# Altium PCB FlexEMG_v0r0.PcbDoc (part 2 of 2)
Units mil, origin at the board's own origin, x right, y up, seen from the top; angles counter-clockwise.
Board outline 1300 x 1550 mil, 8 copper layers (Top Layer, PWR 1, Signal 1, GND, Signal 2, PWR 2, Signal 3, Bottom Layer), stack 66.302 mil thick; 200 components, 251 nets, 1187 pads, 472 vias.
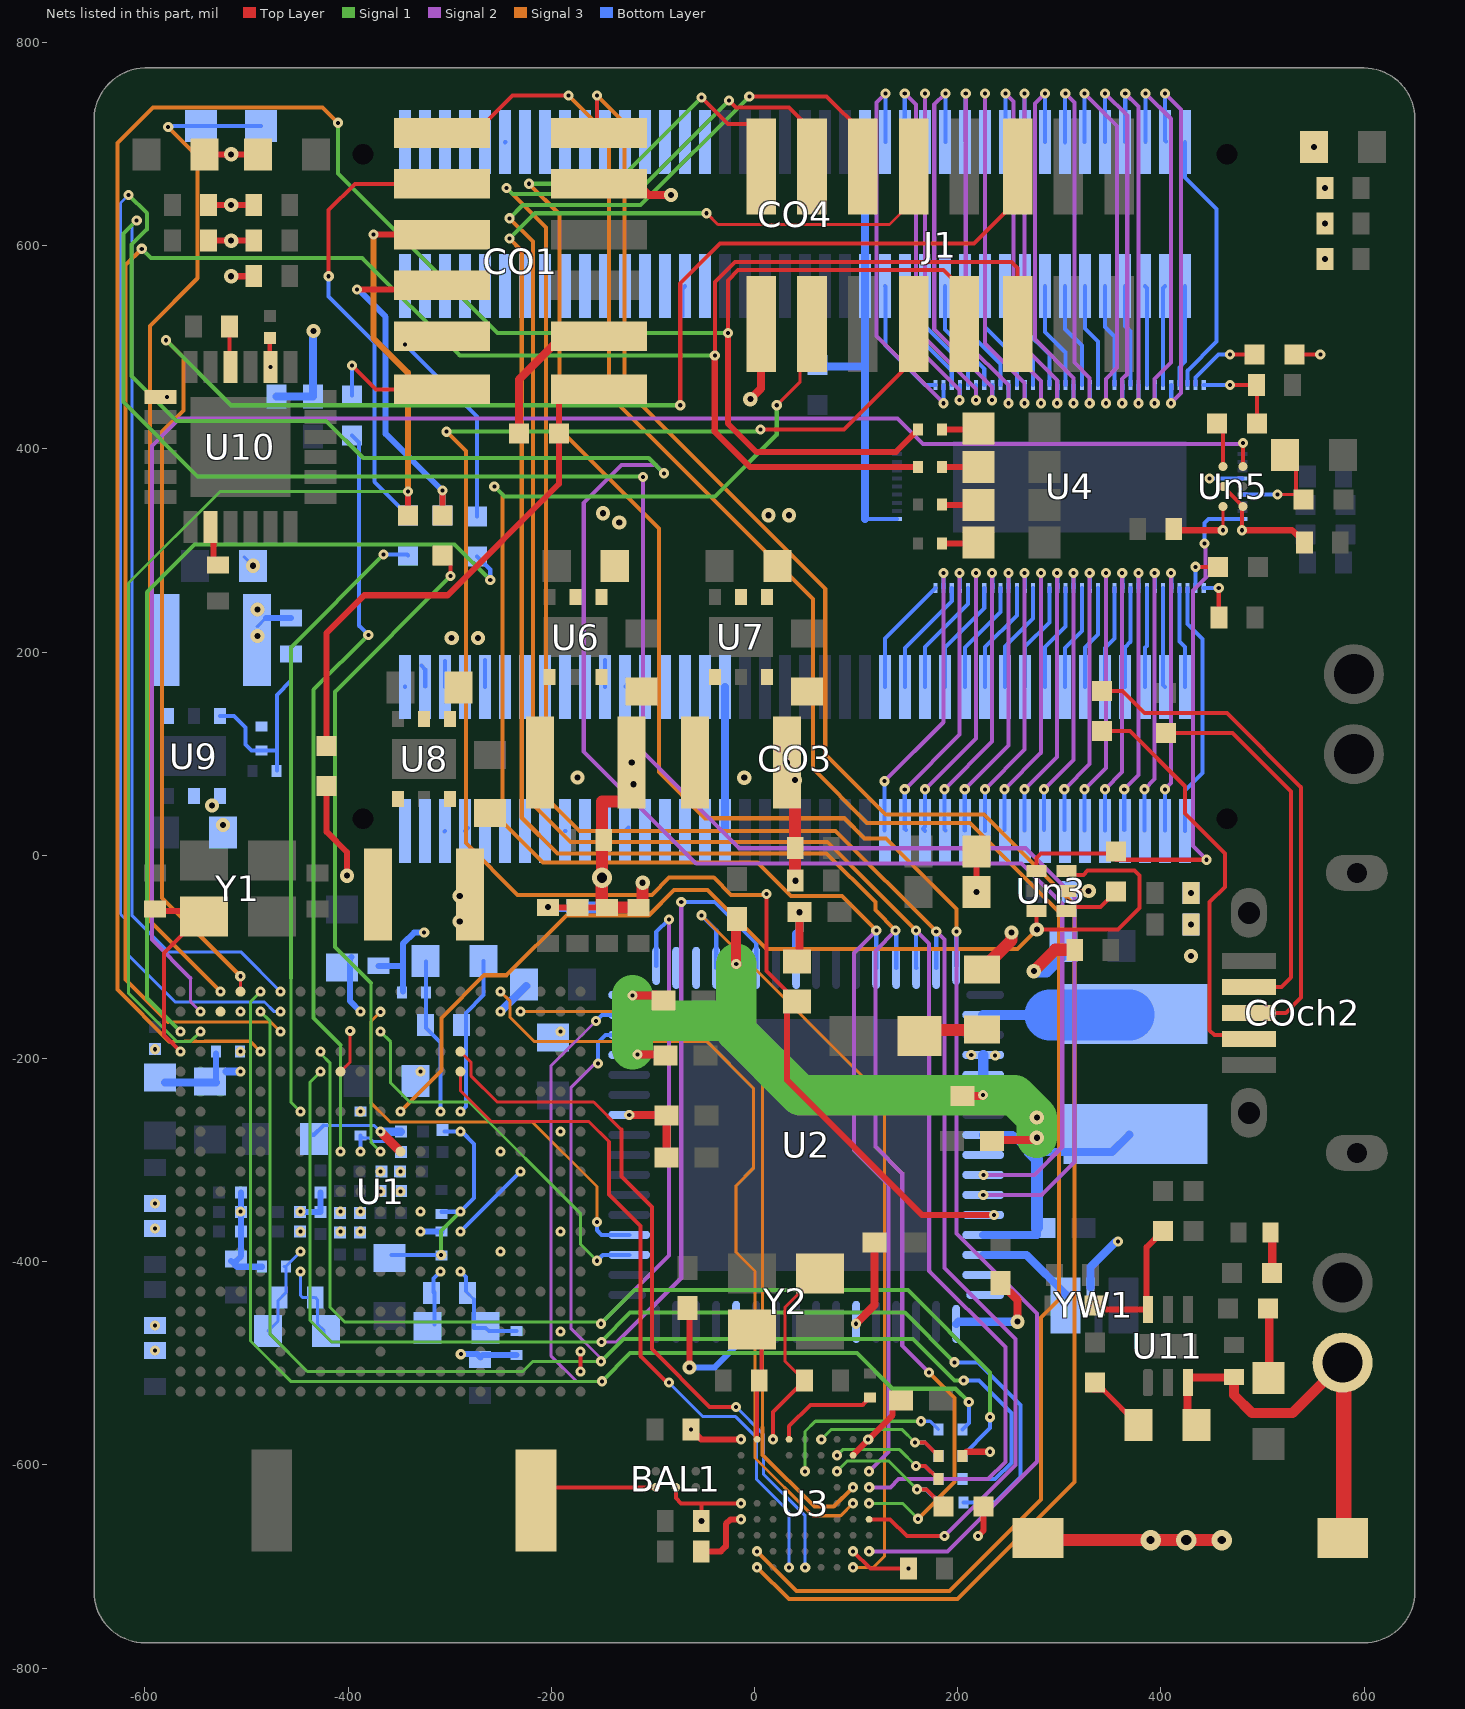
[diagram p8: the nets of this part, all layers, seen from the top]

## Via types
v1: diameter 10, hole 4, Top Layer to Bottom Layer, tented both sides, 361 vias
v2: diameter 14, hole 6, Top Layer to Bottom Layer, tented both sides, 104 vias
v3: diameter 16, hole 8, Top Layer to Bottom Layer, tented both sides, 3 vias
v4: diameter 20, hole 8, Top Layer to Bottom Layer, tented both sides, 2 vias
v5: diameter 20, hole 10, Top Layer to Bottom Layer, tented both sides, 2 vias

## Nets (pads, with @x,y where several pads share a name; then routed paths per layer and width w, separated by ;. In a path a pad name is that pad's centre, name@x,y a point inside that pad or via, vN(x,y) a via of type N, cw(c..) or ccw(c..) an arc to the next point about the centre after c; other vN are vias at no path point) (continued)
GPIO2: J1.11 RcC.2 U1.T3 | length 2232.5
  Top Layer w4: v1(-39,492) -39,564.31 -19.31,584 253.03,584 259.02,578.02 J1.11@259.02,523.15
  Top Layer w6: v1(-39,492) -39,417 -4.12,382.12 RcC.2@161.19,382.12
  Signal 1 w4: v1(-603,597) -594,588 -386,588 -290,492 v1(-39,492)
  Signal 3 w3: -576.98,-164.02 -475.93,-164.02 v1(-466.43,-173.52)
  Signal 3 w4: v1(-603,597) -619,581 -619,-122 -576.98,-164.02
GPIO3: J1.9 RcD.2 U1.U4 | length 2362.5
  Top Layer w4: v1(-26,514) -26,566 -16,576 186,576 206.65,555.35 J1.9@206.65,523.15
  Top Layer w6: v1(-26,514) -26,425 2,397 139.07,397 RcD.2@161.19,419.12
  Signal 1 w4: v1(-410,721) -410,671 -253,514 v1(-26,514)
  Signal 3 w3: -575.98,-183.02 -560.92,-183.02 -549.12,-183 -541.23,-183.02 ; -541.21,-183 -496.31,-183 v1(-486.11,-193.2)
  Signal 3 w4: -576,-183 -627,-132 -627,701 -592,736 -425,736 v1(-410,721)
GPIO4: J1.12 U1.V1 | length 1739.9
  Top Layer w3: U1.V1@-505.8,-134.15 v1@-505.8,-119.2
  Top Layer w4: v1(-73,443) -73,563 -34,602 216,602 259.02,645.02 J1.12@259.02,677.87
  Signal 1 w4: v1(-579,507) -515,443 v1(-73,443)
  Signal 3 w4: v1(-579,507) -562,490 -562,438 -583,417 -583,-42 v1(-506,-119)
GPIO5: R2.1 R2.2 U1.W1 | length 1003.4
  Signal 3 w4: v1(-577,717) -548,688 -548,568 -595,521 -595,-64.63 v1(-525.48,-134.15)
  Bottom Layer w4: v1(-577,717) -576,718 R2.1@-544.53,718 R2.2@-485.47,718
I2C.SCL: U2.63
I2C.SDA: U2.64
JTAG.T\R\S\T\: J1.2 U2.48 U3.H9 | length 2104.3
  Top Layer w4: v1(-52,746) -26,720 -3,720 6.65,710.35 J1.2@6.65,677.87 ; U3.H9@112.83,-685 v1(113,-685)
  Signal 2 w4: v1(113,-685) 189.86,-685 278,-596.86 278,-451.13 199,-372.13 v1(199,-75)
  Signal 1 w4: v1(-222,661) -137,661 v1(-52,746)
  Signal 3 w4: v1(-222,661) -192,631 -192,419.5 -94,321.5 -94,82 -48.5,36.5 88.5,36.5 108.5,16.5 129.5,16.5 199,-53 v1(199,-75)
  Bottom Layer w4: U2.48@198.64,-108.82 198.64,-75.36 v1(199,-75)
JTAG.TCK: J1.3 U2.44 U3.C9 | length 1776.8
  Top Layer w3: v1(22,443) 45,466 45,511.49 J1.3@56.65,523.15
  Signal 2 w4: v1(112.83,-606.26) 132,-587.09 132,-324 98,-290 98,-96 v1(120,-74)
  Signal 1 w4: v1(-256,363) -246,353 -39,353 22,414 v1(22,443)
  Signal 3 w3: v1(-256,363) -248,355
  Signal 3 w4: -248,355 -248,33 -208,-7 3,-7 36,-40 86,-40 v1(120,-74)
  Bottom Layer w3: v1@119.9,-74.1 v1(120,-74)
  Bottom Layer w4: U2.44@119.9,-110.79 v1@119.9,-74.1
JTAG.TDI: J1.4 U2.47 U3.F9 | length 2217
  Top Layer w3: J1.4@56.65,677.87 J1.4@56.65,710.35
  Top Layer w4: v1(-25,743) -18,736 34,736 56.65,713.35 J1.4@56.65,710.35 ; U3.F9@112.83,-653.5 133.5,-653.5 150,-670 v1(187,-670)
  Signal 2 w4: v1(179,-75) 187,-83 187,-406 257,-476 257,-600 v1(187,-670)
  Signal 1 w4: v1(-244,657) -238,651 -117,651 v1(-25,743)
  Signal 3 w4: v1(-244,657) -205,618 -205,57 -172,24 80,24 v1(179,-75)
  Bottom Layer w3: v1(179,-75) v1(179,-75)
  Bottom Layer w4: U2.47@178.95,-110.79 v1(179,-75)
JTAG.TDO: J1.6 U2.46 U3.D9 | length 2181.7
  Top Layer w3: U3.D9@112.83,-622.01 v1(112.99,-622.01)
  Top Layer w4: v1(-5,747) 71,747 106.65,711.35 J1.6@106.65,698
  Signal 2 w4: v1(112.99,-622.01) 133.99,-622.01 142,-614 230.14,-614 247,-597.14 247,-484 172,-409 172,-87 v1(159,-74)
  Signal 1 w4: v1(-241,627) -228,640 -112,640 v1(-5,747)
  Signal 3 w4: v1(-241,627) -218,604 -218,50 -181,13 72,13 127,-42 v1(159,-74)
  Bottom Layer w3: v1(159,-74) v1@159.27,-74.27
  Bottom Layer w4: v1(159,-74) 159,-110.52 U2.46@159.27,-110.79
JTAG.TMS: J1.8 U2.45 U3.E9 | length 2176.1
  Top Layer w3: v1(-47,632) -36,621 133,621 156.65,644.65 J1.8@156.65,677.87
  Signal 2 w4: v1(139,-74) 119,-94 119,-286.5 145.5,-313 145.5,-482.5 v1(172,-509)
  Signal 1 w3: v1(112.83,-637.76) 145.76,-637.76 v1(161,-653)
  Signal 1 w4: v1(-241,607) -216,632 v1(-47,632)
  Signal 3 w4: v1(-241,607) -229,595 -229,37 -194,2 71,2 119,-46 119,-54 v1(139,-74) ; v1(161,-653) 197,-617 197,-534 v1(172,-509)
  Bottom Layer w3: U2.45@139,-110.2 U2.45@139.58,-110.79
  Bottom Layer w4: v1(139,-74) 139.58,-74.58 U2.45@139.58,-110.79
JTAGSEL: Rc3.1 U1.V4
  other v1: -505.8,-193.2
N1_CLK: U1.Y2 Un5.C1 | length 1695.1
  Top Layer w4: Un5.C1@480.84,382.68 v1@480.84,405.16
  Signal 2 w3: -555,-121 -555,-144 v1(-545.17,-153.83)
  Signal 2 w4: -555,-121 -593,-83 -593,403 -566,430 141,430 166,405 480,405 v1(481,406)
N1_CLK_3V: Rn1.2 Un5.C2 | length 44.7
  Top Layer w4: Rn1.2@455.32,425 461.16,419.15 Un5.C2@461.16,382.68
N1_CLK_I: Cn1.2 Rn1.1 U4.86 | length 89.6
  Top Layer w4: v1(468,463) Cn1.2@494.28,463 ; Rn1.1@494.68,425 Cn1.2@494.68,462.6
  Bottom Layer w4: U4.86@442.25,463 v1(468,463)
N1_DC_1V: Cn9.2 U4.10 | length 38.9
  Top Layer w4: v1(457,263) 457,239.28 Cn9.2@457.28,239
  Bottom Layer w4: U4.10@442.25,263 v1(457,263)
N1_E00: CO4.2 U4.84 | length 263.7
  Bottom Layer w4: CO4.2@423.86,701.87 423.86,667.14 455,636 455,505.69 426.25,476.94 U4.84@426.25,463
N1_E01: CO4.1 U4.83 | length 99.5
  Bottom Layer w4: U4.83@418.25,463 418.25,480.25 423.86,485.86 CO4.1@423.86,560.13
N1_E02: CO4.4 U4.82 | length 381.5
  Signal 2 w4: v1(404,750) 420,734 420,455 v1(410,445)
  Bottom Layer w4: v1(404,750) 404,703.69 CO4.4@405,702.69 ; v1@410.25,445 U4.82@410.25,463
N1_E03: CO4.3 U4.81 | length 97.9
  Bottom Layer w4: U4.81@402.25,463 402.25,558.21 CO4.3@404.17,560.13
N1_E04: CO4.6 U4.80 | length 387.6
  Signal 2 w4: v1(385,750) 410,725 410,485 394,469 v1(394,445)
  Bottom Layer w4: CO4.6@385,702.38 v1(385,750) ; v1@394.25,445 U4.80@394.25,463
N1_E05: CO4.5 U4.79 | length 97.9
  Bottom Layer w4: CO4.5@384.49,560.13 386.25,558.37 U4.79@386.25,463
N1_E06: CO4.8 U4.78 | length 376.3
  Signal 2 w4: v1(365,750) 378,737 v1(378,445)
  Bottom Layer w4: CO4.8@365,702.06 v1(365,750) ; v1@378.25,445 U4.78@378.25,463
N1_E07: CO4.7 U4.77 | length 99.4
  Bottom Layer w4: CO4.7@364.8,560.13 365,559.94 365,521 370.25,515.75 U4.77@370.25,463
N1_E08: CO4.10 U4.76 | length 382.2
  Signal 2 w4: v1(345,750) 367,728 367,474 362,469 v1(362,445)
  Bottom Layer w4: CO4.10@345,701.98 v1(345,750) ; v1@362.25,445 U4.76@362.25,463
N1_E09: CO4.9 U4.75 | length 100.9
  Bottom Layer w4: CO4.9@345.12,560.13 345.12,519.88 354.25,510.75 U4.75@354.25,463
N1_E10: CO4.12 U4.74 | length 388.5
  Signal 2 w4: v1(325,750) 357,718 357,480 346,469 v1(346,445)
  Bottom Layer w4: CO4.12@325,702.3 v1(325,750) ; v1@346.25,445 U4.74@346.25,463
N1_E11: CO4.11 U4.73 | length 102.4
  Bottom Layer w4: CO4.11@325.43,560.13 325.43,518.57 338.25,505.75 U4.73@338.25,463
N1_E12: CO4.14 U4.72 | length 381.1
  Signal 2 w4: v1(306,750) 315,741 315,485 330,470 v1(330,445)
  Bottom Layer w4: CO4.14@305.75,701.87 v1@305.75,750 ; v1@330.25,445 U4.72@330.25,463
N1_E13: CO4.13 U4.71 | length 104
  Bottom Layer w4: CO4.13@305.75,560.13 305.75,518.25 322.25,501.75 U4.71@322.25,463
N1_E14: CO4.16 U4.70 | length 391
  Signal 2 w4: v1(286,750) 276,740 276,508 314,470 v1(314,445)
  Bottom Layer w4: CO4.16@286,701.93 v1(286,750) ; v1@314.25,445 U4.70@314.25,463
N1_E15: CO4.15 U4.69 | length 105.5
  Bottom Layer w4: CO4.15@286.06,560.13 286.06,514.94 306.25,494.75 U4.69@306.25,463
N1_E16: CO4.18 U4.68 | length 384
  Signal 2 w4: v1(266,750) 266,500 298,468 v1(298,445)
  Bottom Layer w4: CO4.18@266,702.24 v1(266,750) ; v1@298.25,445 U4.68@298.25,463
N1_E17: CO4.17 U4.67 | length 107
  Bottom Layer w4: CO4.17@266.38,560.13 266.38,516.62 290.25,492.75 U4.67@290.25,463
N1_E18: CO4.20 U4.66 | length 385.3
  Signal 2 w4: v1(247,750) 255,742 255,494 282,467 v1(282,445)
  Bottom Layer w4: CO4.20@247,702.17 v1(247,750) ; v1@282.25,445 U4.66@282.25,463
N1_E19: CO4.19 U4.65 | length 108.5
  Bottom Layer w4: CO4.19@246.69,560.13 246.69,518.31 274.25,490.75 U4.65@274.25,463
N1_E20: CO4.22 U4.64 | length 387.3
  Signal 2 w4: v1(227,750) 227,504 266,465 v1(266,445)
  Bottom Layer w4: CO4.22@227.01,701.87 v1(227,750) ; v1@266.25,445 U4.64@266.25,463
N1_E21: CO4.21 U4.63 | length 110.1
  Bottom Layer w4: CO4.21@227.01,560.13 227.01,519.99 258.25,488.75 U4.63@258.25,463
N1_E22: CO4.24 U4.62 | length 387.9
  Signal 2 w4: v1(208,750) 208,505 250,463 v1(250,445)
  Bottom Layer w4: CO4.24@208,702.54 v1(208,750) ; v1@250.25,445 U4.62@250.25,463
N1_E23: CO4.23 U4.61 | length 111.6
  Bottom Layer w4: CO4.23@207.32,560.13 207.32,518.68 242.25,483.75 U4.61@242.25,463
N1_E24: CO4.26 U4.60 | length 392.9
  Signal 2 w4: v1(188,750) 177,739 177,518 234,461 v1(234,448)
  Bottom Layer w4: CO4.26@188,702.23 v1(188,750) ; v1@234.25,448 U4.60@234.25,463
N1_E25: CO4.25 U4.59 | length 113.1
  Bottom Layer w4: CO4.25@187.64,560.13 187.64,517.36 226.25,478.75 U4.59@226.25,463
N1_E26: CO4.28 U4.58 | length 385.8
  Signal 2 w4: v1(168,750) 168,509 218,459 v1(218,448)
  Bottom Layer w4: CO4.28@167.95,701.87 v1(168,750) ; v1@218.25,448 U4.58@218.25,463
N1_E27: CO4.27 U4.57 | length 114.7
  Bottom Layer w4: CO4.27@167.95,560.13 167.95,521.05 210.25,478.75 U4.57@210.25,463
N1_E28: CO4.30 U4.56 | length 386.9
  Signal 2 w4: v1(148,750) 159,739 159,501 202,458 v1(202,448)
  Bottom Layer w4: v1(148,750) 148,703.6 CO4.30@149,702.6 ; v1@202.25,448.25 U4.56@202.25,463
N1_E29: CO4.29 U4.55 | length 116.2
  Bottom Layer w4: CO4.29@148.27,560.13 149,559.4 149,522 194.25,476.75 U4.55@194.25,463
N1_E30: CO4.32 U4.54 | length 401.8
  Signal 2 w4: v1(129,750) 120,741 120,511 v1(186,445)
  Bottom Layer w4: CO4.32@129,702.28 v1(129,750) ; v1@186.25,445 U4.54@186.25,463
N1_E31: CO4.31 U4.53 | length 123.7
  Bottom Layer w4: CO4.31@128.58,560.13 129,559.72 129,502 168,463 U4.53@178.25,463
N1_E32: CO3.80 U4.12 | length 252.1
  Bottom Layer w4: CO3.80@423.86,24.13 423.86,63.86 441,81 441,213 426.25,227.75 U4.12@426.25,263
N1_E33: CO3.79 U4.13 | length 99.5
  Bottom Layer w4: U4.13@418.25,263 418.25,210.46 423.86,204.86 CO3.79@423.86,165.87
N1_E34: CO3.78 U4.14 | length 270.9
  Signal 2 w4: v1(404,65) 410,71 v1(410,278)
  Bottom Layer w4: CO3.78@404,24.31 v1(404,65) ; U4.14@410.25,263 v1@410.25,277.75
N1_E35: CO3.77 U4.15 | length 97.9
  Bottom Layer w4: U4.15@402.25,263 402.25,167.79 CO3.77@404.17,165.87
N1_E36: CO3.76 U4.16 | length 272.3
  Signal 2 w4: v1(384,65) 394,75 v1(394,278)
  Bottom Layer w4: CO3.76@384,24.62 v1(384,65) ; U4.16@394.25,263 v1@394.25,277.75
N1_E37: CO3.75 U4.17 | length 97.9
  Bottom Layer w4: CO3.75@384.49,165.87 384.49,204.49 386.25,206.25 U4.17@386.25,263
N1_E38: CO3.74 U4.18 | length 273.6
  Signal 2 w4: v1(364,65) 378,79 v1(378,278)
  Bottom Layer w4: CO3.74@364,24.94 v1(364,65) ; U4.18@378.25,263 v1@378.25,277.75
N1_E39: CO3.73 U4.19 | length 99.4
  Bottom Layer w4: CO3.73@364.8,165.87 364.8,204.8 370.25,210.25 U4.19@370.25,263
N1_E40: CO3.72 U4.20 | length 275.5
  Signal 2 w4: v1(345,65) 362,82 v1(362,278)
  Bottom Layer w4: CO3.72@345,24.25 v1(345,65) ; U4.20@362.25,263 v1@362.25,277.75
N1_E41: CO3.71 U4.21 | length 100.9
  Bottom Layer w4: CO3.71@345.12,165.87 345.12,204.12 354.25,213.25 U4.21@354.25,263
N1_E42: CO3.70 U4.22 | length 276.9
  Signal 2 w4: v1(325,65) 346,86 v1(346,278)
  Bottom Layer w4: CO3.70@325,24.57 v1(325,65) ; U4.22@346.25,263 v1@346.25,277.75
N1_E43: CO3.69 U4.23 | length 102.4
  Bottom Layer w4: CO3.69@325.43,165.87 325.43,204.57 338.25,217.39 U4.23@338.25,263
N1_E44: CO3.68 U4.24 | length 278.2
  Signal 2 w4: v1(305,65) 330,90 v1(330,278)
  Bottom Layer w4: CO3.68@305,24.88 v1(305,65) ; U4.24@330.25,263 v1@330.25,277.75
N1_E45: CO3.67 U4.25 | length 104
  Bottom Layer w4: CO3.67@305.75,165.87 305.75,204.25 322.25,220.76 U4.25@322.25,263
N1_E46: CO3.66 U4.26 | length 279.6
  Signal 2 w4: v1(285,65) 314,94 v1(314,278)
  Bottom Layer w4: CO3.66@285,25.2 v1(285,65) ; U4.26@314.25,263 v1@314.25,277.75
N1_E47: CO3.65 U4.27 | length 105.5
  Bottom Layer w4: CO3.65@286.06,165.87 286.06,204.94 306.25,225.13 U4.27@306.25,263
N1_E48: CO3.64 U4.28 | length 281.5
  Signal 2 w4: v1(266,65) 298,97 v1(298,278)
  Bottom Layer w4: CO3.64@266,24.51 v1(266,65) ; U4.28@298.25,263 v1@298.25,277.75
N1_E49: CO3.63 U4.29 | length 107
  Bottom Layer w4: CO3.63@266.38,165.87 266.38,205.38 290.25,229.25 U4.29@290.25,263
N1_E50: CO3.62 U4.30 | length 282.8
  Signal 2 w4: v1(246,65) 282,101 v1(282,278)
  Bottom Layer w4: CO3.62@246,24.83 v1(246,65) ; U4.30@282.25,263 v1@282.25,277.75
N1_E51: CO3.61 U4.31 | length 108.5
  Bottom Layer w4: CO3.61@246.69,165.87 246.69,205.69 274.25,233.25 U4.31@274.25,263
N1_E52: CO3.60 U4.32 | length 284.8
  Signal 2 w4: v1(227,65) 266,104 v1(266,278)
  Bottom Layer w4: CO3.60@227.01,24.13 v1(227,65) ; U4.32@266.25,263 v1@266.25,277.75
N1_E53: CO3.59 U4.33 | length 110.1
  Bottom Layer w4: CO3.59@227.01,165.87 227.01,204.99 258.25,236.24 U4.33@258.25,263
N1_E54: CO3.58 U4.34 | length 286.1
  Signal 2 w4: v1(207,65) 250,108 v1(250,278)
  Bottom Layer w4: CO3.58@207,24.46 v1(207,65) ; U4.34@250.25,263 v1@250.25,277.75
N1_E55: CO3.57 U4.35 | length 111.6
  Bottom Layer w4: CO3.57@207.32,165.87 207.32,204.68 242.25,239.61 U4.35@242.25,263
N1_E56: CO3.56 U4.36 | length 288.1
  Signal 2 w4: v1(187,65) 234,112 v1(234,278)
  Bottom Layer w4: v1(187,65) 187,25.5 CO3.56@188,24.5 ; U4.36@234.25,263 v1@234.25,277.75
N1_E57: CO3.55 U4.37 | length 113.1
  Bottom Layer w4: CO3.55@187.64,165.87 187.64,204.64 226.25,243.25 U4.37@226.25,263
N1_E58: CO3.54 U4.38 | length 290.9
  Signal 2 w4: v1(168,65) 218,115 v1(218,278)
  Bottom Layer w4: CO3.54@168,24.18 166,26.18 168,28.18 v1(168,65) ; U4.38@218.25,263 v1@218.25,277.75
N1_E59: CO3.53 U4.39 | length 114.7
  Bottom Layer w4: CO3.53@167.95,165.87 167.95,204.95 210.25,247.25 U4.39@210.25,263
N1_E60: CO3.52 U4.40 | length 290.7
  Signal 2 w4: v1(148,65) 202,119 v1(202,278)
  Bottom Layer w4: v1(148,65) 148,25.87 CO3.52@149,24.87 ; U4.40@202.25,263 v1@202.25,277.75
N1_E61: CO3.51 U4.41 | length 116.2
  Bottom Layer w4: CO3.51@148.27,165.87 148.27,204.27 194.25,250.25 U4.41@194.25,263
N1_E62: CO3.50 U4.42 | length 292.1
  Signal 2 w4: v1(128,73) 186,131 v1(186,278)
  Bottom Layer w4: CO3.50@128,24.72 v1(128,73) ; U4.42@186.25,263 v1@186.25,277.75
N1_E63: CO3.49 U4.43 | length 117.7
  Bottom Layer w4: CO3.49@128.58,165.87 128.58,213.33 U4.43@178.25,263
N2_CLK: U1.W2
N2_E00: CO4.49
N2_E01: CO4.50
N2_E02: CO4.51 | length 30.3
  Bottom Layer w4: CO4.51@-71,531 -71,557.4 CO4.51@-68.27,560.13
N2_E03: CO4.52
N2_E04: CO4.53
N2_E05: CO4.54
N2_E06: CO4.55
N2_E07: CO4.56
N2_E08: CO4.57
N2_E09: CO4.58
N2_E10: CO4.59
N2_E11: CO4.60
N2_E12: CO4.61
N2_E13: CO4.62
N2_E14: CO4.63
N2_E15: CO4.64
N2_E16: CO4.65
N2_E17: CO4.66
N2_E18: CO4.67
N2_E19: CO4.68
N2_E20: CO4.69
N2_E21: CO4.70 | length 0.6
  Bottom Layer w4: CO4.70@-245.43,701.87 CO4.70@-245,702.3
N2_E22: CO4.71
N2_E23: CO4.72
N2_E24: CO4.73
N2_E25: CO4.74
N2_E26: CO4.75
N2_E27: CO4.76
N2_E28: CO4.77
N2_E29: CO4.78
N2_E30: CO4.79
N2_E31: CO4.80
N2_E32: CO3.31
N2_E33: CO3.32
N2_E34: CO3.29
N2_E35: CO3.30
N2_E36: CO3.27
N2_E37: CO3.28
N2_E38: CO3.25
N2_E39: CO3.26
N2_E40: CO3.23 | length 4.2
  Bottom Layer w4: CO3.23@-127,166.19 CO3.23@-124,169.19
N2_E41: CO3.24 | length 4.7
  Bottom Layer w4: CO3.24@-127.32,24.13 CO3.24@-124,27.46
N2_E42: CO3.21 | length 26.2
  Bottom Layer w4: CO3.21@-147.01,165.87 CO3.21@-147.01,192.07
N2_E43: CO3.22
N2_E44: CO3.19
N2_E45: CO3.20
N2_E46: CO3.17
N2_E47: CO3.18 | length 0.5
  Bottom Layer w4: CO3.18@-186.38,24.13 CO3.18@-186,23.76
N2_E48: CO3.15
N2_E49: CO3.16
N2_E50: CO3.13
N2_E51: CO3.14
N2_E52: CO3.11
N2_E53: CO3.12
N2_E54: CO3.9 | length 26.2
  Bottom Layer w4: CO3.9@-265.12,165.87 CO3.9@-265.12,192.07
N2_E55: CO3.10
N2_E56: CO3.7
N2_E57: CO3.8 | length 4
  Bottom Layer w4: CO3.8@-284.8,24.13 CO3.8@-282,26.94
N2_E58: CO3.5 | length 25.6
  Bottom Layer w4: CO3.5@-304.49,165.87 CO3.5@-304.49,191.49
N2_E59: CO3.6 | length 0.7
  Bottom Layer w4: CO3.6@-305,23.62 CO3.6@-304.49,24.13
N2_E60: CO3.3 | length 22.3
  Bottom Layer w4: CO3.3@-327.75,186.75 -324,183 CO3.3@-324,166.04
N2_E61: CO3.4
N2_E62: CO3.1 | length 0.2
  Bottom Layer w4: CO3.1@-343.86,165.87 CO3.1@-343.75,165.98
N2_E63: CO3.2
N12C_D: U1.K7 Un3.3 Un3.6 | length 1015.9
  Top Layer w4: v2@277.47,-72.47 Un3.3@277.47,-54.68 ; v2(278,-73) 358,-73 379,-52 379,-20 374,-15 328,-15 323.84,-19.16 310.85,-19.16 Un3.6@307,-15.32
  Signal 3 w4: v1(-348.32,-252.26) -308,-211.94 -308,-160 -266,-118 -244,-118 -185,-59 -104,-59 -79,-34 -46,-34 12,-92 259,-92 v2(278,-73)
N12C_D_I: Rn9.1 U4.9 Un3.1 | length 566.9
  Top Layer w4: Un3.1@277.47,-15.32 277.47,-2.53 282,2 349.69,2 356,-4.32 v1(445,-4.32)
  Signal 2 w4: v1(443,307) 444,306 444,275 445,274 431.68,260.68 431.68,9 v1(445,-4.32)
  Bottom Layer w4: v1(443,307) 443,327 447,331 U4.9@480.25,331
NetANT1_1: ANT1.1 BAL1.A1 | length 117.9
  Top Layer w4: ANT1.1@-210,-633.9 -198.1,-622 BAL1.A1@-97,-622
NetCa3_2: Ca3.2 U10.20 | length 38
  Top Layer w6: Ca3.2@-532.53,285.29 U10.20@-532.53,323.26
NetCa4_2: Ca4.2 U10.10 | length 39
  Top Layer w4: U10.10@-516.68,481.57 Ca4.2@-516.68,520.53
NetCd1_2: Cd1.2 Cd2.2 Rd2.2 Rd3.1 U1.G8 U1.G12 | length 224.7
  Signal 1 w4: v1(-308.27,-393.43) -308.27,-369.69 v1(-289.26,-350.68)
  Bottom Layer w4: Cd1.2@-357,-393.43 v1(-308.27,-393.43) ; Rd3.1@-308.12,-350.81 -289.39,-350.81 v1(-289.26,-350.68) -276,-337.43 -276,-284 -288.06,-271.94 v1(-289.26,-271.94) Cd2.2@-305.23,-271.94
NetCe1_1: Ce1.1 Re1.2 | length 40.8
  Top Layer w8: Ce1.1@507.75,-371 509.68,-372.94 Re1.2@509.68,-411
NetCe3_1: Ce3.1 Re5.2 | length 58.6
  Top Layer w5: Re5.2@334,-526 343.32,-526 Ce3.1@378.14,-560.82
NetCn2_2: Cn2.2 Rn3.1 U4.6 | length 104.2
  Top Layer w3: v1(515,355) 535.32,355 Rn3.1@540.32,350
  Top Layer w4: Cn2.2@525.46,393 533,385.46 533,357.32 Rn3.1@535.32,355
  Bottom Layer w4: U4.6@480.25,355 v1(515,355)
NetCOch2_2: COch2.2 Re8.2 | length 409.1
  Top Layer w4: Re8.2@342,122.32 369.68,122.32 424,68 424,41 463,2 463,-31 448,-46 448,-172.18 452.82,-177 483.02,-177 COch2.2@486.61,-180.59
NetCOch2_3: COch2.3 Re8.1 | length 499.8
  Top Layer w4: Re8.1@342,161.68 362.32,161.68 384,140 465,140 538,67 538,-140 523,-155 COch2.3@486.61,-155
NetCOch2_4: COch2.4 Re7.2 | length 375
  Top Layer w4: Re7.2@405,120.32 470.68,120.32 528,63 528,-120 518.59,-129.41 COch2.4@486.61,-129.41
NetCr5_2: Cr5.2 U3.A4 | length 104.5
  Top Layer w4: U3.A4@34.09,-574.76 34.09,-561.91 55,-541 106.62,-541 Cr5.2@114,-533.62
NetCs9_1: Cs9.1 Rs1.1 Rs2.2 U9.3 | length 199.9
  Bottom Layer w3: Rs1.1@-485.12,103.19 Rs1.1@-484.93,103 ; Rs2.2@-470.19,83.12 Rs2.2@-470,83.31 ; -470.19,102 -470,102.19
  Bottom Layer w4: U9.3@-526,137 -512,137 -501,126 -501,109 -495.02,103.02 Rs1.1@-486.59,103.02 ; Rs1.1@-484.93,103 -470,103 ; Rs2.2@-470,83.31 -470,158 -456,172 Cs9.1@-456,198.28
NetJ1_7: J1.7 R1.1 U2.60 | length 1744
  Top Layer w4: v1(6,419) 88,419 156.65,487.65 J1.7@156.65,523.15 ; v1(12,-38) 12,-113.68 R1.1@42,-143.68
  Top Layer w6: R1.1@42,-143.68 32,-143.68 32,-221 164.9,-353.9 v1(235.9,-353.9)
  Signal 1 w4: v1(-303,417) 4,417 v1(6,419)
  Signal 3 w4: v1(-303,417) -284,398 -284,12 -233,-39 -101,-39 -84,-22 -40,-22 -23,-39 11,-39 v1(12,-38)
  Bottom Layer w3: U2.60@225.21,-353.9 v1(235.9,-353.9)
NetL1_2: L1.2 U2.50 | length 143.8
  Bottom Layer w10: U2.50@225.21,-157.05 291,-157.05
  Bottom Layer w50: 291,-157.05 368.9,-157.05 L1.2@369,-156.94
NetLED0_1: LED0.1 Rc0.1 | length 35.8
  Top Layer w6: Rc0.1@184.81,345.12 184.93,345 LED0.1@220.52,345
NetLED1_1: LED1.1 Rc1.1 | length 36.9
  Top Layer w6: Rc1.1@184,307.12 Rc1.1@184.81,307.12 219.64,307.12 LED1.1@220.52,308
NetLED2_1: LED2.1 RcC.1 | length 35.6
  Top Layer w6: RcC.1@184.81,382.12 LED2.1@220.4,382.12
NetLED3_1: LED3.1 RcD.1 | length 34.8
  Top Layer w6: RcD.1@184.81,419.12 LED3.1@219.64,419.12
NetLED4_1: LED4.1 Re2.1 | length 67.8
  Top Layer w8: LED4.1@506.68,-513.83 Re2.1@506.68,-446
NetLs1_2: Ls1.2 U6.1
NetLs2_2: Ls2.2 U7.1
NetLs3_2: Ls3.2 U8.1
NetLs4_2: Ls4.2 U9.1
NetRe4_2: Re4.2 Re6.1 U11.6 | length 140.2
  Top Layer w6: Re6.1@333.17,-447.07 U11.6@387.32,-447.07 ; U11.6@386,-447.07 386,-385.59 Re4.2@402,-369.58 ; Re4.2@404,-371.55 Re4.2@404,-369.59
NetRn2_1: Rn2.1 U4.85 | length 74.9
  Top Layer w4: v1(468,493) Rn2.1@492.32,493
  Bottom Layer w4: U4.85@434.25,463 434.25,470.49 456.77,493 v1(468,493)
NetRn4_2: Rn4.2 U4.11 | length 43.1
  Top Layer w4: v1(434,284) Rn4.2@456.32,284
  Bottom Layer w4: U4.11@434.25,263 v1@434.25,283.75
NetRn9_2: Rn9.2 Un3.4 | length 56.9
  Top Layer w4: Un3.4@307,-54.68 310.68,-51 340.69,-51 Rn9.2@356,-35.68
NetU1_A19: U1.A19 U1.A20 | length 19.7
  Top Layer w4: v1(-171.15,-508.17) v1(-171.15,-488.48)
NetU1_D10: U1.D10 U1.G13 | length 83.5
  Bottom Layer w4: v1(-289.26,-370.37) v1(-230.2,-311.32)
NetU1_G4: U1.G4 U3.J5 | length 719.2
  Top Layer w3: U1.G4@-289.26,-193.2 -279.07,-203.39 -279.07,-216.9 -253.21,-242.76 -158.24,-242.76 -131,-270
  Top Layer w4: -131,-270 -131,-316 -101,-346 -101,-486 -44,-543 v1(-18,-543)
  Bottom Layer w3: v1(-18,-543) 8.85,-569.85 8.85,-608.85 50,-650 v1(50,-701)
NetU1_G5: U1.G5 U3.J4 | length 698.2
  Top Layer w3: U1.G5@-289.26,-212.89 -289.26,-231.74 -259,-262 -163,-262 -143,-282 ; v1@-86,-519 v1(-84,-519)
  Top Layer w4: -143,-282 -143,-334 -112,-365 -112,-493 v1@-86,-519
  Bottom Layer w3: v1(-84,-519) -50.5,-552.5 -18.5,-552.5 1.85,-572.85 1.85,-613.85 34,-646 v1(34,-701)
NetU1_L2: U1.L2 U2.20 | length 427
  Top Layer w3: v1(-368,-154) U1.L2@-368,-153.83
  Signal 3 w3: v1(-368,-154) -377.5,-163.5 -377.5,-243.5 -358.56,-262.44 -218.56,-262.44 -155,-326 v1(-155,-361)
  Bottom Layer w4: v1(-155,-361) -155,-369 -150.42,-373.58 U2.20@-123.21,-373.58
NetU1_L3: U1.L3 U2.19 | length 382
  Signal 1 w3: v1(-368,-173.52) -358,-183.52 -358,-224 -339.24,-242.76 -281,-242.76 -171,-352.76 -171,-383 v1(-155,-399)
  Bottom Layer w4: v1(-155,-399) -149.27,-393.27 U2.19@-123.21,-393.27
NetU1_T1: U1.T1 U2.59 | length 2708.3
  Signal 2 w4: v1(-109.5,372.5) -109.5,101.5 -15,7 267,7 315,-41 315,-302 282.79,-334.21 v1(225.21,-334.21)
  Signal 1 w4: v1(-608,625) -621,612 -621,446 -548,373 -110,373 v1(-109.5,372.5)
  Bottom Layer w3: v1(-608,625) -612.5,620.5 -612.5,-59.5 -577,-95 -505.57,-95 v1(-466.43,-134.15)
NetU1_T2: U1.T2 U2.58 | length 2887.1
  Signal 2 w4: v1(-89,376) -97,384 -131,384 -168,347 -168,102.03 -123.97,58 -123.26,58 -57.26,-8 263,-8 303,-48 303,-287 275.47,-314.53 v1(225.53,-314.53)
  Signal 1 w4: v1(-616,650) -598,632 -598,616 -598.14,616 -613,601.14 -613,471.86 -568.67,427.53 -421.53,427.53 -385,391 -104,391 v1(-89,376)
  Bottom Layer w3: v1(-616,650) -624,642 -624,-57.9 -618.43,-63.46 -618.43,-96.02 -570.12,-144.33 -482.18,-144.33 -472.68,-153.83 v1(-466.43,-153.83) ; U2.58@225.21,-314.53 v1(225.53,-314.53)
NetU2_36: U2.36 U3.J8 | length 798.7
  Signal 3 w3: v1(-52,-59) 128,-239 128,-690 117.25,-700.75 v1(97.09,-700.75)
  Bottom Layer w4: v1(-52,-59) -37.58,-73.42 U2.36@-37.58,-110.79
NetU2_62: U2.62 YW1.3 | length 98.7
  Bottom Layer w8: U2.62@225.21,-393.27 267.72,-393.27 YW1.3@307.46,-433
NM1_REF: CO4.33 CO4.34 RnF.2 U4.44 | length 449.7
  Bottom Layer w3: RnF.2@62,482.68 RnF.2@63.69,481
  Bottom Layer w4: 109,331 U4.44@140.25,331
  Bottom Layer w8: RnF.2@63.69,481 109,481 ; 109,331 109,448 109,481 ; CO4.34@109,701.76 109,481
NM2_REF: CO3.33 CO3.34 | length 141.7
  Bottom Layer w8: CO3.34@-28.9,24.13 CO3.33@-28.9,165.87
NSFRESET: Cc3.2 Rc2.2 U1.M9 | length 62.6
  Bottom Layer w3: Rc2.2@-387.88,-275.81 -387.68,-275.81 -385.5,-278 -379,-278 -375.5,-281.5 -358.33,-281.5 Cc3.2@-347.83,-292
  Bottom Layer w4: v1(-387.68,-291.63) Rc2.2@-387.68,-275.81
POR_N: U2.57
RXD: U1.D2 U3.D8 | length 757.5
  Signal 3 w3: v1(-230.2,-153.83) -229.17,-153.83 -228.83,-153.5 -52.5,-153.5 8,-214 8,-563
  Signal 3 w4: 8,-563 8,-590 59,-641 78.09,-641 v1(97.09,-622.01)
SPI_CLK: Rr2.1 Rr6.2 U3.B7 | length 141.8
  Top Layer w4: v1(159,-601) 168,-601 Rr6.2@181,-614
  Signal 2 w4: v1@81,-590.17 v1(81.34,-590.51)
  Signal 1 w3: v1(81.34,-590.51) 86.85,-585 143,-585 v1(159,-601)
  Bottom Layer w4: v1(159,-601) 168,-601 Rr2.1@181,-614
SPI_CLK_SF: Rr2.2 U1.U2 U2.30 | length 1586.6
  Signal 2 w3: v1(-154,-205) -157.01,-205 -180.65,-228.64 -180.65,-465.55 -151,-495.19 v1(-151,-498)
  Signal 1 w3: v1(-486.11,-153.83) -476.61,-163.33 -476.61,-471.39 -440,-508 -228,-508 -218,-498 v1(-151,-498)
  Signal 1 w4: v1(-151,-498) -129,-476 156,-476 197,-517 v1(206,-517)
  Bottom Layer w4: v1(-154,-205) -154,-184 -146.73,-176.73 U2.30@-123.21,-176.73 ; Rr2.2@204.62,-614 237,-614 253,-598 253,-549 221,-517 v1(206,-517)
SPI_NCS: Rr3.1 Rr5.2 U3.C7 | length 155.4
  Top Layer w4: v1(160,-624) 169.31,-624 Rr5.2@186.32,-641
  Signal 2 w4: v1(81.34,-606.26) v1@81.34,-606.09
  Signal 1 w3: v1(81.34,-606.26) 91.6,-596 132,-596 v1(160,-624)
  Bottom Layer w4: v1(160,-624) 169,-624 Rr3.1@182,-637
SPI_NCS_SF: Rr3.2 U1.P5 U2.38 | length 1736.9
  Signal 2 w3: v1(-427.06,-212.89) v1@-424.94,-215 ; v1(-150.5,-479) -135.1,-479
  Signal 2 w4: -135.1,-479 -72,-415.9 v1(-72,-46)
  Signal 1 w3: v1(-427.06,-212.89) -437.24,-223.07 -437.24,-457.76 -416,-479 -175.1,-479 -167.21,-478.98 v1(-150.5,-479)
  Signal 1 w4: v1@-150.7,-478.3 -122.41,-450 148,-450 v1(197,-499)
  Bottom Layer w4: v1(-72,-46) -38.58,-46 1.79,-86.37 U2.38@1.79,-110.79 ; v1(197,-499) 220,-499 262,-541 262,-612 237,-637 Rr3.2@205.62,-637
SPI_SDI: Rr1.1 U3.C5 | length 177.8
  Signal 1 w3: v1(49.84,-606.26) 49.84,-567.16 60,-557 v1(164,-557)
  Bottom Layer w3: v1(164,-557) 173,-557 Rr1.1@181,-565
SPI_SDI_SF: Rr1.2 U1.U1 U2.31 | length 1576.2
  Signal 2 w3: v1(-156,-163) -200.33,-207.33 -200.33,-492.42 -175.08,-517.67 v1(-150,-517.67)
  Signal 1 w3: v1(-486.11,-134.15) -496,-144.04 -496,-478 -456.33,-517.67 v1(-150,-517.67)
  Signal 1 w4: v1(-150,-517.67) -122.33,-490 101,-490 136,-525 198,-525 v1(211,-538)
  Bottom Layer w4: v1(-156,-163) -150.05,-157.05 U2.31@-123.21,-157.05 ; Rr1.2@204.62,-565 211,-558.62 v1(211,-538)
SPI_SDO: Rr0.1 Rr4.2 U3.A6 | length 158.8
  Top Layer w4: U3.A6@65.59,-574.76 v1(65.83,-575) ; v1(158,-578) 168,-578 Rr4.2@181,-591
  Signal 1 w3: v1(65.83,-575) 75.83,-565 145,-565 v1(158,-578)
  Bottom Layer w4: v1(158,-578) 168,-578 Rr0.1@181,-591
SPI_SDO_SF: Rr0.2 U1.P4 U2.33 | length 1529.3
  Signal 2 w4: v1(-151,-461) -84,-394 v1(-84,-63)
  Signal 1 w3: v1(-427.06,-193.2) -427.06,-195.01 -417.56,-204.51 -417.56,-445 -403.26,-459.3 -152.7,-459.3 v1(-151,-461)
  Signal 1 w4: v1(-151,-461) -118,-428 151,-428 232,-509 v1(232,-553)
  Bottom Layer w4: U2.33@-96.64,-108.82 -96.64,-75.64 v1(-84,-63) ; Rr0.2@204.62,-591 232,-563.62 v1(232,-553)
SPIM_SDIO2: U2.34
SPIM_SDIO3: U2.35
SW_BATT: Cs1.2 Cs3.2 Cs5.2 Cs7.2 SW1.1 U6.4 U6.5 U7.4 U7.5 U8.4 U8.5 U9.4 U9.5 | length 180.4
  Top Layer w3: SW1.1@279,-672 SW1.1@280,-673
  Top Layer w12: SW1.1@281,-674 v4(390,-674) v5(425,-674) v4(460,-674)
  other v2: -523,30 -534,49 -298,214 -272,214 -133,327.73 14,334.73 34,334.73 -149,336.73
SWCLK: CO1.1 U3.H2 | length 2121.4
  Top Layer w4: CO1.1@-307.54,710.98 -275.02,710.98 -238,748 v1(-183,748)
  Signal 3 w4: v1(-183,748) -143,708 -143,453 57.5,252.5 57.5,85.5 111,32 212,32 300,-56 300,-437 282,-455 282,-634 192,-724 41.6,-724 v1(2.6,-685)
SWDIO: CO1.2 U3.J2 | length 2027.4
  Top Layer w4: v1(-155,748) -155,713.17 CO1.2@-152.82,710.98
  Signal 3 w4: v1(-155,748) -128,721 -128,459.76 69.76,262 69.76,99.24 129,40 226,40 315,-49 315,-617 200,-732 33.85,-732 v1(2.6,-700.75)
TCK: Rc9.1 U1.L9 | length 656.1
  Top Layer w4: Rc9.1@-307,295.32 -299,287.31 v1(-299,275)
  Signal 1 w3: -377.5,-125.5 -377.5,-282.13 v1(-368,-291.63)
  Signal 1 w4: -377.5,-125.5 -413,-90 -413,161 v1(-299,275)
TCK_I: CO1.7 Rc7.2 Rc9.2 | length 364.7
  Top Layer w6: v1(-391,557) -311.56,557 CO1.7@-307.56,561 ; Rc9.2@-307,334.68 v1(-307,359)
  Bottom Layer w6: v1@-389,556 -363,530 -363,415 v1(-307,359) Rc7.2@-307,334.68
TDI: RcA.1 U1.N9 | length 745
  Signal 1 w3: -407.5,-186.5 -407.5,-291.5 v1(-407.37,-291.63)
  Signal 1 w4: -407.5,-186.5 -434,-160 -434,163 v1(-380,217)
  Bottom Layer w4: RcA.1@-396,413.32 -389,406.32 -389,226 v1(-380,217)
TDI_I: CO1.11 RcA.2 | length 127.5
  Top Layer w4: v1(-396,482) -372.62,458.62 CO1.11@-307.54,458.62
  Bottom Layer w4: RcA.2@-396,452.68 v1(-396,482)
TDOR: Rc6.2 U1.R7 | length 614.3
  Signal 1 w3: -456.24,-120.76 -456.24,-242.76 v1(-446.74,-252.26)
  Signal 1 w4: -456.24,-120.76 -456.24,204.76 v1(-365,296)
  Bottom Layer w4: v1(-365,296) -341.69,296 Rc6.2@-341,295.32
TDOR_I: CO1.3 Rc6.1 | length 455.8
  Top Layer w4: v1(-419,570) -419,635 -393.02,660.98 CO1.3@-307.54,660.98
  Bottom Layer w4: v1@-419,571 -419,550 -374,505 -374,367.68 Rc6.1@-341,334.68
TMS: RcB.1 U1.AA3 | length 846.9
  Signal 1 w4: v1(-564.85,-173.52) -598,-140.37 -598,258.97 -550.97,306 -295,306 v1(-260,271)
  Bottom Layer w4: RcB.1@-273,294.32 -260,281.32 v1(-260,271)
TMS_I: CO1.9 RcB.2 | length 198.7
  Bottom Layer w4: v1(-344,503) -273,432 RcB.2@-273,333.68
TRST: CO1.5 Rc8.2 U1.Y3 | length 1168.3
  Top Layer w6: v1(-375,611) CO1.5@-307.56,611 ; Rc8.2@-341,334.68 v1(-341,358)
  Signal 1 w3: v1(-545.17,-173.52) -554.67,-183.02 -568.79,-183.02 -616,-135.81 -616,268 -526,358 v1(-341,358)
  Signal 3 w6: v1(-375,611) -375,509 -341,475 v1(-341,358)
TXD: U1.E1 U3.E8 | length 801.6
  Signal 3 w3: v1(-249.89,-134.15) -240.39,-143.65 -240.39,-159.61 -216.98,-183.02 -46.98,-183.02 -1,-229 -1,-308 -18,-325 -18,-391 0.5,-409.5 0.5,-593.11 57.39,-650 84.84,-650 v1(97.09,-637.76)
VAVD: C1.2 RVREG1.1 U2.52 U2.53 | length 82.4
  Top Layer w12: C1.2@161.46,-172 223.53,-172 RVREG1.1@224,-171.53
  Bottom Layer w10: U2.53@225.21,-216.1 U2.52@225.21,-196.42
  other v1: 237,-197 213.42,-196.42
VBATT: Ce2.2 Ce3.2 CObat.1 SW1.2 U11.3 | length 413.1
  Top Layer w8: Ce3.2@436.53,-562.75 426.37,-552.59 426.37,-517.75 430.3,-513.82 Ce2.2@472,-513.82
  Top Layer w10: Ce2.2@472,-513.5 472,-531.14 489.86,-549 529.37,-549 CObat.1@579,-499.37
  Top Layer w15: SW1.2@580,-663 CObat.1@580,-499
VCLU: C9.2 C10.2 C21.2 C22.2 CW1.2 CW2.2 L1.1 U2.29 U2.32 U2.37 U2.54 U2.56 U2.61 | length 1124.2
  Top Layer w8: v1(-120,-138) -98.69,-138 -97.69,-137 C10.2@-86.69,-148 ; v1(-115,-196) -88.69,-196 C9.2@-87.69,-197 ; CW2.2@204.69,-237 v1@225,-237 ; CW1.2@233.69,-280 276,-280 v2(278,-278)
  Top Layer w10: C21.2@-18,-63.69 -18,-106.9 v1(-17.9,-107)
  Signal 1 w40: -120,-191 v1(-120,-138) ; -119,-162.92 -18,-162.92 ; v1(-17.9,-107) -17.9,-173.1 45,-236 v1(225,-236) 256,-236 v2(278,-258) v2(278,-278)
  Bottom Layer w8: U2.61@225.21,-373.58 278.11,-373.58 C22.2@278.11,-366 ; U2.56@225.21,-275.16 254.16,-275.16 257,-278 ; U2.54@225.21,-235.79 255.79,-235.79 v2(278,-258) ; v2(278,-278) 257,-278 ; L1.1@369,-275.06 352.06,-292 271,-292 257,-278
  Bottom Layer w12: 271,-292 278.11,-299.11 C22.2@278.11,-366
VDD_1V2: C20.2 Cb1.2 Cb2.2 Cb3.2 Cb4.2 Cb5.2 Cb6.2 Cb7.2 Cb8.2 Cb9.2 Cb10.2 Cb11.2 Cb12.2 Cb20.2 Cb21.2 Cb22.2 Cb23.2 Cb24.2 Cb25.2 Cb26.2 Cb27.2 Cb28.2 Cb30.2 Cb31.2 Cs2.2 Ls1.1 U1.J5 U1.K10 U1.K11 U1.L10 U1.L11 U1.M12 U1.M13 U1.N12 U1.N13 U1.R12 U1.R13 U6.3 Un3.5 | length 476.2
  Top Layer w4: Un3.5@307,-35 v2(329,-35)
  Top Layer w6: v2(-203,-51) -202.72,-51.28 Cb24.2@-174,-51.28 Cb26.2@-150.28,-51.28 ; v5@-150.28,-22.28 v5@-150.28,-22 ; v2(218.54,-36) Cb31.2@218.54,4
  Top Layer w12: Cb26.2@-150.28,-51.28 -150.28,-22.28 v5(-150,-22) ; v5@-150.28,-22 -150,-21.72 -150,53 -130.53,53 -120.76,62.76 v2(-120.76,91.42) ; Cb26.2@-145,-51.28 Cb27.2@-114,-51.28 -110,-47.28 v2(-110,-27)
  Bottom Layer w4: Cb20.2@310.72,-36 328,-36 v2(329,-35)
  Bottom Layer w6: Cb5.2@-446.25,-351.17 Cb12.2@-427,-351.17 Cb11.2@-427,-331.83 ; Cb21.2@-203,-52.72 -175.72,-52.72 Cb22.2@-174,-51
  Bottom Layer w12: Cb22.2@-174,-51.28 Cb23.2@-145,-51.28 Cb23.2@-146,-50.28 ; -150,-42.28 v5(-150,-22)
  other v1: -446.74,-370.37 -407.37,-370.37 -387.68,-370.37 -446.74,-350.68 -407.37,-350.68 -387.68,-350.68 -368,-331 -348.32,-331 -368,-311.32 -348.32,-311.32 -328.63,-212.89
  other v2: -119,70 -10,76.45 -174,76.73
VDD_1V8: C3.2 C4.2 C5.2 C6.2 C7.2 C8.2 C11.2 C12.2 C13.2 Ca2.2 Cb40.2 Cb41.2 Cb42.2 Cb43.2 Cb44.2 Cb45.2 Cb46.2 Cb47.2 Cb50.2 CO1.4 Cr3.2 Cr4.2 Cr6.1 Cr7.2 Cs4.2 J1.1 Ls2.1 R1.2 R6.2 R7.2 Rd2.1 Rr4.1 Rr5.1 RVREG1.2 U1.B3 U1.B8 U1.B13 U1.B18 U1.E2 U1.E9 U1.E14 U1.J12 U1.J13 U1.M2 U1.N5 U1.V2 U2.1 U2.6 U2.12 U2.26 U2.40 U3.A1 U3.B8 U3.F1 U3.H8 U7.3 U10.8 Un5.A1 Un5.B2 YW1.4 | length 1697.8
  Top Layer w3: U1.N5@-407.37,-212.89 -397.87,-203.39 v1(-397.87,-173)
  Top Layer w4: U10.8@-477,481.27 Ca2.2@-477,509.17 ; v1(97.09,-685) 114.09,-702 Cr4.2@149,-702 ; Un5.B2@461.16,363 Un5.A1@480.84,343.31 480,342.47 v1(480,320)
  Top Layer w6: v2(-64,-504) C8.2@-64,-445.69 ; v1(-62.28,-565) -52.52,-574.76 v1(-13.15,-574.76) ; Cr7.2@-54.25,-685 Cr7.2@-52.28,-685 -33,-685 -28,-680 -28,-658 -23.5,-653.5 v1(-13.15,-653.5) ; U3.B8@97.09,-590.51 97.09,-589.91 v1(112,-575) 136,-551 136,-538 137,-537 Cr3.2@146.28,-537 ; Rr4.1@204.62,-591 208.62,-587 v1(232,-587) ; v1(220,-670) 225.68,-664.32 Rr5.1@225.68,-641 ; v1(480,320) 529.28,320 Cb40.2@541.28,308
  Top Layer w8: CO1.4@-161.8,652 CO1.4@-152.82,660.98 -114.98,660.98 -104,650 v2(-82,650) ; v1(-123.21,-255.47) -87.21,-255.47 C7.2@-86.69,-256 C4.2@-86.69,-298 ; v2(-4,449) 6.65,459.65 J1.1@6.65,523.15 ; R1.2@42,-104.32 44.31,-102 v2(44.31,-56) ; v1(100,-461) 118.31,-442.69 C5.2@118.31,-381 ; C3.2@242,-420.69 259,-437.68 v2(259,-459)
  Top Layer w12: Cb41.2@40,-21.28 v2(40,74) ; RVREG1.2@224,-112.47 253,-83.47 v2(253,-76) ; v2(275,-114) 296,-93 Cb46.2@315.28,-93
  Bottom Layer w6: C13.2@-396.57,-100 -398,-101.43 -398,-143.52 v1(-387.68,-153.83) ; v1@-328.45,-370.19 Rd2.1@-307.88,-370.19 ; v2(-64,-504) -39,-504 -17.9,-482.9 U2.12@-17.9,-459.21
  Bottom Layer w8: R7.2@-470.45,451.76 R6.2@-434.45,451.76 -434.45,515.55 v2(-434,516) ; v1(-249.89,-153.83) C12.2@-224.57,-128.52 ; U2.26@-123.68,-255 v1(-123.21,-255.47) ; U2.40@41.16,-110.79 41.16,-77.16 44.31,-74 v2(44.31,-56) ; U2.1@198.77,-461.31 U2.1@198.64,-461.18 200.82,-459 v2(259,-459) ; YW1.4@330.75,-425.29 330.75,-405.25 356,-380 v1(358,-380)
  Bottom Layer w12: v2(275,-114) 287.46,-114 Cb50.2@307.46,-94
  other v1: 151.54,-702 -190.83,-468.8 -249.89,-390.06 -328.63,-370.37 -190.83,-370.37 -328.63,-350.68 -249.89,-291.63 -190.83,-271.94 -190.83,-173.52 -505.8,-153.83 -476.47,480.74
  other v2: 429.72,-99 429.72,-68 429.72,-37 40.28,-25 31.88,91.42
VDD_2V5: C14.2 C15.2 C16.2 C17.2 C18.2 C19.2 C34.2 C58.2 C80.2 Cb60.2 Cb70.2 Cb71.2 Cb72.2 Cb73.2 Cb80.2 Cs6.2 Ls3.1 R3.1 R4.1 R5.1 Rc2.1 Rc3.2 Rc4.1 U1.K9 U1.M7 U1.V5 U1.V12 U8.3 | length 567.1
  Top Layer w6: Rc4.1@-421,68.32 -421,23 -401,3 v2(-401,-20)
  Top Layer w9: v1(-368,-271.94) U1.K9@-348.32,-291.63
  Bottom Layer w3: C18.2@-424.31,-265.89 -374.06,-265.89 v1(-368,-271.94) ; -346.03,-108.72 -345.75,-108.43
  Bottom Layer w4: C18.2@-436.43,-275 -433.43,-275 C18.2@-424.31,-265.89
  Bottom Layer w6: C14.2@-530,-223.43 Rc3.2@-530,-195 ; C80.2@-515,-399.25 -509.37,-404.88 R5.1@-484.81,-404.88 ; C80.2@-510,-399.25 -505.17,-394.43 C16.2@-505.17,-370 C15.2@-505.17,-351 C17.2@-505.17,-332 ; Rc2.1@-388.19,-252.19 Rc2.1@-387.88,-252.19 ; C34.2@-370,-108.72 -346.03,-108.72 ; R3.1@-345.75,-133.82 -345.75,-108.43 -345.75,-86.75 -335,-76 v1(-325,-76) ; v1(-289,-491) -272.75,-491 -269.75,-494 -267.56,-491.81 R4.1@-234.12,-491.81
  Bottom Layer w8: Cb80.2@-580,-223.43 C14.2@-530,-223.43 ; -519.46,-212.89 v1(-505.8,-212.89) ; v1@-367.94,-272 C19.2@-347.83,-272
  other v1: -590,-487.28 -590,-462.72 -590,-367.28 -505.8,-350.68 -590,-342.72 -387.68,-252.26 -590,-190.83
  other v2: -290,-65 -290,-40
VDD_3V0: Ca1.2 Cb90.2 Cb91.2 Cb92.2 Cb93.2 Cb94.2 Cb95.2 Cb96.2 Cb97.2 CbA0.2 CbA1.2 CbB0.2 Cs8.2 Cs9.2 Ls4.1 Rn2.2 Rs1.2 U4.4 U10.13 Un5.A2 | length 349.7
  Top Layer w3: v1(461,320) 461,343.16 Un5.A2@461.16,343.31
  Top Layer w4: Rn2.2@531.68,493 v1(557,493)
  Top Layer w6: U10.13@-584.74,451 v1(-578,451) ; CbA0.2@-541.46,690 v2(-515,690) CbB0.2@-488.54,690 ; Cb92.2@-537.28,605 v2(-515,605) Cb93.2@-492.72,605 ; Cb90.2@-537.28,640 v2(-515,640) Cb91.2@-492.72,640 ; v2(-515,570) Ca1.2@-492.72,570 ; Cb94.2@412.72,320 v1(461,320)
  Bottom Layer w3: Cs8.2@-502.28,293.83 v2(-493.46,285) ; Ls4.1@-489.35,225.08 Ls4.1@-480.72,233.72
  Bottom Layer w4: v1(448,371) U4.4@480.25,371
  Bottom Layer w6: Ls4.1@-480.72,233.72 Cs9.2@-456,233.72
  other v2: -489,216 -489,242 561.57,587 561.57,622 561.57,657 550.74,697
VDD_PA: BAL1.A2 Cr8.2 U3.E1 | length 94.2
  Top Layer w4: BAL1.A2@-77.31,-622 -77.31,-632.62 -72.18,-637.76 v1(-13.15,-637.76) ; v2(-52,-655) -52,-637.76
VDDPLL0: C32.2 C33.2 R3.2 U1.H7 | length 153.8
  Bottom Layer w4: C33.2@-323.19,-104.35 R3.2@-323.19,-134.88 -323.19,-169.81 -308.94,-184.06 v1(-308.94,-252.26)
VDDPLL1: C56.2 C57.2 R4.2 U1.G15 | length 106.9
  Bottom Layer w3: C56.2@-284,-429 C56.2@-281,-432 ; C56.2@-283.25,-430 C56.2@-276,-437.25
  Bottom Layer w4: v1(-289.26,-409.74) -284,-415 C56.2@-284,-429 ; C56.2@-276,-437.25 -276,-465 C57.2@-264.46,-465 -261.27,-468.19 R4.2@-234.12,-468.19
VDDPLL2: C78.2 C79.2 R5.2 U1.R14 | length 92.9
  Bottom Layer w3: C79.2@-478.54,-468 -469,-458.46 -469,-438.25 -461.19,-430.44 R5.2@-461.19,-404.88 ; R5.2@-463.19,-404.88 -461.57,-404.88 v1(-446.74,-390.06)
VJTAG: CO1.12 Rc4.2 Rc5.1 | length 526.3
  Top Layer w6: Rc4.2@-421,107.68 -421,219 -384,256 -302,256 -192.32,365.68 CO1.12@-192.32,459 ; CO1.12@-152.82,458.62 CO1.12@-120.62,458.62
VPUMP: CO1.10 Rc5.2 | length 149.9
  Top Layer w8: Rc5.2@-231.68,415 -231.68,468.32 -189.02,510.98 CO1.10@-152.82,510.98
VSSPLL0: C32.1 C33.1 U1.G7 | length 157.7
  Bottom Layer w4: v1(-289.26,-252.26) -284,-247 -284,-155 -266.46,-137.46 C33.1@-266.46,-104
VSSPLL1: C56.1 C57.1 U1.H15 | length 54.9
  Bottom Layer w4: C56.1@-315.75,-430 -315.75,-416.54 v1(-308.94,-409.74) ; C57.1@-314.75,-461.83 C56.1@-314.75,-430
VSSPLL2: C78.1 C79.1 U1.R15 | length 77.4
  Bottom Layer w3: v1(-446.74,-409.74) -446.74,-433.26 -445,-435 C78.1@-432.28,-435 -430,-437.28 -430,-461.43 -423.43,-468 C79.1@-423.43,-470
XC1: Cr2.1 U3.A2 Y2.3 | length 87.4
  Top Layer w4: U3.A2@2.6,-574.76 Cr2.1@2.6,-526.6 ; Y2.3@7,-472 7,-507 Cr2.1@10,-510
XC2: Cr1.1 U3.A3 Y2.1 | length 201.7
  Top Layer w3: Cr1.1@43.35,-522.94 Cr1.1@49.28,-517 30,-497.72 30,-445 59.56,-415.44 Y2.1@60.46,-415.44
  Top Layer w4: v1(18.35,-574.76) 18.35,-547.94 Cr1.1@49.28,-517
XTAL: Cc2.2 U1.AA4 Y1.3 | length 208.1
  Top Layer w4: v1(-564.85,-193.2) -581,-177.06 -581,-96 -545.32,-60.32 Y1.3@-541.93,-60.32
  Top Layer w6: Cc2.2@-590,-54.69 -547.57,-54.69 Y1.3@-541.93,-60.32
pads on no net: ANT1.2 CO3.0 CO3.35 CO3.36 CO3.37 CO3.38 CO3.39 CO3.40 CO3.41 CO3.42 CO3.43 CO3.44 CO3.45 CO3.46 CO3.47 CO3.48 CO4.0 CO4.35 CO4.36 CO4.37 CO4.38 CO4.39 CO4.40 CO4.41 CO4.42 CO4.43 CO4.44 CO4.45 CO4.46 CO4.47 CO4.48 COch2.6 COch2.7 COch2.8 COch2.9 J1.13 J1.15 J1.16 U1.A2 U1.A3 U1.A4 U1.A5 U1.A7 U1.A8 U1.A9 U1.A10 U1.A12 U1.A13 U1.A14 U1.A15 U1.A17 U1.A18 U1.AA5 U1.AA6 U1.AA7 U1.AA8 U1.AA9 U1.AA10 U1.AA11 U1.AA13 U1.AA15 U1.AA17 U1.AA19 U1.AA21 U1.B1 U1.B2 U1.B4 U1.B5 U1.B6 U1.B7 U1.B9 U1.B10 U1.B11 U1.B12 U1.B14 U1.B15 U1.B16 U1.B17 U1.B19 U1.B20 U1.B21 U1.C1 U1.C2 U1.C6 U1.C11 U1.C16 U1.C20 U1.C21 U1.D1 U1.D4 U1.D5 U1.D6 U1.D8 U1.D9 U1.D11 U1.D13 U1.D14 U1.D15 U1.D16 U1.D18 U1.D20 U1.D21 U1.E4 U1.E5 U1.E6 U1.E7 U1.E8 U1.E10 U1.E11 U1.E12 U1.E13 U1.E15 U1.E16 U1.E17 U1.E18 U1.E20 U1.E21 U1.F1 U1.F2 U1.F3 U1.F5 U1.F17 U1.F18 U1.F19 U1.F20 U1.G1 U1.G2 U1.G9 U1.G10 U1.G11 U1.G17 U1.G18 U1.G20 U1.G21 U1.H2 U1.H4 U1.H5 U1.H17 U1.H20 U1.H21 U1.J1 U1.J2 U1.J4 U1.J15 U1.J17 U1.J18 U1.J20 U1.J21 U1.K1 U1.K2 U1.K15 U1.K17 U1.K18 U1.K20 U1.K21 U1.L1 U1.L5 U1.L7 U1.L15 U1.L17 U1.L18 U1.L19 U1.L20 U1.L21 U1.M1 U1.M4 U1.M5 U1.M15 U1.M18 U1.M20 U1.N1 U1.N2 U1.N4 U1.N7 U1.N15 U1.N17 U1.N18 U1.N20 U1.N21 U1.P1 U1.P2 U1.P17 U1.P18 U1.P20 U1.P21 U1.R2 U1.R8 U1.R9 U1.R10 U1.R11 U1.R17 U1.R18 U1.R20 U1.R21 U1.T17 U1.T18 U1.T19 U1.T20 U1.U8 U1.U9 U1.U10 U1.U11 U1.U12 U1.U14 U1.U15 U1.U17 U1.U18 U1.U20 U1.U21 U1.V6 U1.V7 U1.V8 U1.V9 U1.V10 U1.V11 U1.V13 U1.V14 U1.V15 U1.V16 U1.V17 U1.V18 U1.V20 U1.V21 U1.W6 U1.W11 U1.W16 U1.W20 U1.W21 U1.Y5 U1.Y7 U1.Y8 U1.Y9 U1.Y10 U1.Y11 U1.Y13 U1.Y15 U1.Y17 U1.Y19 U1.Y21 U2.2 U2.3 U2.4 U2.5 U2.7 U2.8 U2.9 U2.10 U2.11 U2.13 U2.14 U2.15 U2.16 U2.21 U2.22 U2.23 U2.24 U2.25 U2.27 U2.28 U2.39 U2.41 U2.42 U2.43 U2.51 U2.55 U3.A5 U3.A7 U3.A8 U3.B5 U3.B6 U3.B9 U3.C6 U3.E2 U3.E3 U3.E7 U3.F2 U3.F3 U3.F7 U3.G1 U3.G2 U3.G3 U3.G4 U3.G5 U3.G7 U3.G8 U3.H1 U3.H4 U3.H5 U3.H6 U3.H7 U3.J3 U4.0 U4.1 U4.2 U4.45 U4.46 U4.47 U4.48 U4.49 U4.51 U4.52 U10.2 U10.3 U10.4 U10.5 U10.6 U10.7 U10.14 U10.15 U10.16 U10.17 U10.19 U10.21 U10.22 YW1.1

## Polygon pours and split planes (outlines as drawn)
VDD_1V2 on PWR 1 (split plane): 354.9,-229.89 54.89,-529.9 -204.9,-529.9 -204.9,-430 -205.29,-428.05 -206.4,-426.4 -208.05,-425.29 -210,-424.9 -432.89,-424.9 -459.9,-397.89 -459.9,-322.11 -427.89,-290.1 -352.62,-290.1 -350.67,-289.71 -349.01,-288.6 -339.4,-278.99 -338.29,-277.33 -337.9,-275.38 -337.9,-198.11 -314.15,-174.35 -266.4,-126.6 -265.29,-124.95 -264.9,-123 -264.9,0 -264.9,99.9 354.9,99.9
SW_BATT on PWR 1 (split plane): 433.4,295.4 435.05,294.29 437,293.9 629.9,293.9 629.9,-725 629.95,-725.5 629.62,-729.69 628.52,-734.27 626.72,-738.62 624.26,-742.63 621.21,-746.21 617.63,-749.26 613.62,-751.72 609.27,-753.52 604.69,-754.62 600.5,-754.95 600,-754.9 -120.47,-754.9 -120.47,-540.1 57,-540.1 58.95,-539.71 60.6,-538.6 363.6,-235.6 364.71,-233.95 365.1,-232 365.1,105 364.71,106.95 363.6,108.6 361.95,109.71 360,110.1 -270,110.1 -271.95,109.71 -273.6,108.6 -274.71,106.95 -275.1,105 -275.1,5.1 -629.9,5.1 -629.9,192.9 -415,192.9 -413.05,193.29 -411.4,194.4 -410.29,196.05 -409.9,198 -409.9,340.9 387.89,340.9
VDD_3V0 on PWR 1 (split plane): 604.69,754.62 609.27,753.52 613.62,751.72 617.63,749.26 621.21,746.21 624.26,742.63 626.72,738.62 628.52,734.27 629.62,729.69 629.95,725.5 629.9,725 629.9,304.1 439.11,304.1 393.6,349.6 391.95,350.71 390,351.1 -415,351.1 -416.95,350.71 -418.6,349.6 -419.71,347.95 -420.1,346 -420.1,203.1 -629.9,203.1 -629.9,725 -629.91,725.06 -629.63,728.64 -628.48,733.41 -626.6,737.94 -624.04,742.13 -620.86,745.86 -617.13,749.04 -612.94,751.6 -608.41,753.48 -603.64,754.63 -600.06,754.91 -600,754.9 600,754.9 600.5,754.95
VDD_2V5 on PWR 1 (split plane): -275.1,-120.89 -321.35,-167.15 -346.6,-192.4 -347.71,-194.05 -348.1,-196 -348.1,-273.27 -354.73,-279.9 -430,-279.9 -431.95,-280.29 -433.6,-281.4 -468.6,-316.4 -469.71,-318.05 -470.1,-320 -470.1,-400 -469.71,-401.95 -468.6,-403.6 -438.6,-433.6 -436.95,-434.71 -435,-435.1 -215.1,-435.1 -215.1,-529.9 -629.64,-529.9 -629.9,-529.95 -629.9,-5.1 -275.1,-5.1
GND on GND (split plane): 604.69,754.62 609.27,753.52 613.62,751.72 617.63,749.26 621.21,746.21 624.26,742.63 626.72,738.62 628.52,734.27 629.62,729.69 629.95,725.5 629.9,725 629.9,-725 629.95,-725.5 629.62,-729.69 628.52,-734.27 626.72,-738.62 624.26,-742.63 621.21,-746.21 617.63,-749.26 613.62,-751.72 609.27,-753.52 604.69,-754.62 600.5,-754.95 600,-754.9 -120.47,-754.9 -120.47,-535 -629.9,-535 -629.9,2.9 -467,2.9 -465.05,3.29 -463.4,4.4 -385.4,82.4 -384.29,84.05 -383.9,86 -383.9,332.89 -376.89,339.9 71.9,339.9 71.9,258 71.9,196.55 72.29,194.6 73.4,192.95 75.05,191.84 77,191.45 504,191.45 505.95,191.84 507.6,192.95 508.71,194.6 509.1,196.55 508.71,198.5 507.6,200.16 505.95,201.26 504,201.65 82.1,201.65 82.1,345 81.71,346.95 80.6,348.6 78.95,349.71 77,350.1 -379,350.1 -380.95,349.71 -382.6,348.6 -392.6,338.6 -393.71,336.95 -394.1,335 -394.1,88.11 -469.11,13.1 -629.9,13.1 -629.9,725 -629.91,725.06 -629.63,728.64 -628.48,733.41 -626.6,737.94 -624.04,742.13 -620.86,745.86 -617.13,749.04 -612.94,751.6 -608.41,753.48 -603.64,754.63 -600.06,754.91 -600,754.9 600,754.9 600.5,754.95
VDD_1V8 on PWR 2 (split plane): 604.69,754.62 609.27,753.52 613.62,751.72 617.63,749.26 621.21,746.21 624.26,742.63 626.72,738.62 628.52,734.27 629.62,729.69 629.95,725.5 629.9,725 629.9,-725 629.95,-725.5 629.62,-729.69 628.52,-734.27 626.72,-738.62 624.26,-742.63 621.21,-746.21 617.63,-749.26 613.62,-751.72 609.27,-753.52 604.69,-754.62 600.5,-754.95 600,-754.9 -120.47,-754.9 -120.47,-535 -629.9,-535 -629.9,725 -629.91,725.06 -629.63,728.64 -628.48,733.41 -626.6,737.94 -624.04,742.13 -620.86,745.86 -617.13,749.04 -612.94,751.6 -608.41,753.48 -603.64,754.63 -600.06,754.91 -600,754.9 600,754.9 600.5,754.95

## Keep-outs
Keep-Out Layer:
  lines w10: -650,-725 ccw(c-600,-725) -600,-775 ; -650,-725 ccw(c-600,-725) -600,-775 ; -650,-725 -650,725 ; -650,725 cw(c-598.75,723.75) -600,775 ; -650,725 cw(c-600,725) -600,775 ; -600,-775 600,-775 ; -600,775 600,775 ; 600,-775 ccw(c600,-725) 650,-725 ; 600,-775 ccw(c600,-725) 650,-725 ; 600,775 cw(c600,725) 650,725 ; 600,775 cw(c600,725) 650,725 ; 650,-725 650,725

## Other copper
Top Layer:
  region net SW_BATT: -116,249.73 -181,249.73 -181,260.73 -159,279.73 -159,344.73 -116,344.73
  region net VDD_1V2: -111,44.73 -154,44.73 -154,173.73 -111,173.73
  region net NetLs1_2: -196,45.04 -235.36,45.04 -235.36,138.04 -208,167.73 -207,175.04 -196,175.04
  region net GND: -117,206.27 -202,206.27 -221.54,276.27 -221.54,296.27 -187,296.27 -187,226.27 -117,226.27
  region net GND: 45,206 -40,206 -59.54,276 -59.54,296 -25,296 -25,226 45,226
  region net NetLs2_2: -44,168.73 -71.36,136.73 -73.36,44.73 -33.36,44.73 -33.36,168.73
  region net VDD_1V8: 8.18,174.73 8.18,44.61 59,44.61 59,174.73
  region net SW_BATT: 44,249.73 -18,249.73 -18,260.19 2,278.81 2,344.73 44,344.73
  region net NetLs3_2: -345,-85 -384.36,-85 -384.36,10 -356,30 -356,35 -356,55.31 -345,55.31
  region net VDD_2V5: -260,-85 -305,-85 -305,54 -260,54
  region net SW_BATT: -265,130 -330,130 -330,141 -305,160 -305,223 -265,223
  region net GND: -270,85 -355,85 -374.54,155 -374.54,175 -340,175 -340,140.46 -340,105 -270,105
  region net VAVD: 207,-183 207,-204 241,-204 241,-184.29 237,-178 212,-178
Bottom Layer:
  region net SW_BATT: -514.48,60 -555,60 -555,46.04 -535,26.04 -535,10 -514.48,10
  region net GND: -566.59,97.63 -581.59,97.63 -581.59,17.63 -566.59,17.63 -566.59,77.63
  region net NetLs4_2: -582.09,143.13 -594.55,166.09 -594.55,257.63 -565.59,257.63 -565.59,166.63 -571.59,143.13
  region net VDD_3V0: -480,125 -490,125 -490,155 -503.59,166.09 -503.59,262.78 -475.5,262.78 -475.5,166.09 -480,155
  region net VCLU: 276,-245 294,-245 317,-245 317,-268 317,-303 273,-303 266,-296 266,-255
PWR 1 (plane layer: these items are gaps in the copper):
  pour cut-out: -650,-535 -650,-775 -120.47,-775 -120.47,-535
  lines w10: -650,0 -455,0 -375,0 -270,0 ; -650,198 -415,198 -415,346 390,346 437,299 650,299 ; -629.64,-535 -210,-535 ; -18,-64 -18,-63.69 ; -270,0 -270,-123 -317.75,-170.75 -343,-196 -343,-275.38 -352.62,-285 -430,-285 -465,-320 -465,-400 -435,-430 -210,-430 -210,-535 ; -270,0 -270,105 360,105 360,-232 57,-535 -210,-535
GND (plane layer: these items are gaps in the copper):
  pour cut-out: -650,-535 -650,-775 -120.47,-775 -120.47,-535
  lines w10: -654,8 -586,8 -467,8 -389,86 -389,335 -379,345 77,345 ; 77,258 77,345 ; 404,-284 404,-264 ; 504,196.55 77,196.55 77,345
PWR 2 (plane layer: these items are gaps in the copper):
  pour cut-out: -650,-535 -650,-775 -120.47,-775 -120.47,-535

## Silkscreen, mask and mechanical layers (free items; w line width, h text height)
Bottom Solder:
  region: 95,510 525,510 525,215 95,215
Mechanical 1:
  drawing of 215 lines, arcs and shapes, not listed

## Text inside footprints (layer, text, board x,y; h text height)
ANT1: Top Overlay "AF" at -517.24,-628.11 h20 r180
COch2: Mechanical 13 "board edge" at 667,12 h20 r90
SW1: Top Overlay "OFF" at 576,-737 h20 r90; Top Overlay "ON" at 303.02,-612.94 h20